# EAGLE board CT_schematic (EAGLE 7.6.0)

Size 100 x 80 mm. Coordinates in mm from the lower left corner, seen from the top.
Outline: 0,0 100,0 100,80 0,80 0,0
Copper layers (1*16): Top 0.035mm / dielectric 1.5mm / Bottom 0.035mm
Design rules "default": minimum track width 10mil, minimum drill 24mil, track to track 8mil, track to pad 8mil, pad to pad 8mil, via to via 8mil, smd to smd 8mil, copper to edge 40mil, drill to drill 8mil, minimum pad ring 10mil, minimum via ring 8mil, stop-mask expansion 4mil, vias tented up to drill 0mil, thermal gap 10mil

## Footprints (pad centres in the part's own frame; a part is rotated, then mirrored left to right if it is on the bottom)
C0603 = smd 0.8 x 0.8: 1 -0.762,0; 2 0.762,0
C0402 = smd 0.5 x 0.5: 1 -0.508,0; 2 0.508,0
C1206 = smd 1.3 x 1.6: 1 -1.524,0; 2 1.524,0
C1210 = smd 1.2 x 2.5: 1 -1.524,0; 2 1.524,0
EXV-9H = smd 3.505 x 1.676: 1 -2.857,0; 2 2.857,0
L0603 = smd 0.8 x 0.8: 1 -0.762,0; 2 0.762,0
PJ-037B_PACKAGE = drill 3.7 square: 1 12,0 | drill 3.2 square: 2 6,0
R0603 = smd 0.8 x 0.8: 1 -0.762,0; 2 0.762,0
LQFP64 = smd 0.3 x 1.2: 1 -3.75,-5.75; 2 -3.25,-5.75; 3 -2.75,-5.75; 4 -2.25,-5.75; 5 -1.75,-5.75; 6 -1.25,-5.75; 7 -0.75,-5.75; 8 -0.25,-5.75; 9 0.25,-5.75; 10 0.75,-5.75; 11 1.25,-5.75; 12 1.75,-5.75; 13 2.25,-5.75; 14 2.75,-5.75; 15 3.25,-5.75; 16 3.75,-5.75; 33 3.75,5.75; 34 3.25,5.75; 35 2.75,5.75; 36 2.25,5.75; 37 1.75,5.75; 38 1.25,5.75; 39 0.75,5.75; 40 0.25,5.75; 41 -0.25,5.75; 42 -0.75,5.75; 43 -1.25,5.75; 44 -1.75,5.75; 45 -2.25,5.75; 46 -2.75,5.75; 47 -3.25,5.75; 48 -3.75,5.75 | smd 1.2 x 0.3: 17 5.75,-3.75; 18 5.75,-3.25; 19 5.75,-2.75; 20 5.75,-2.25; 21 5.75,-1.75; 22 5.75,-1.25; 23 5.75,-0.75; 24 5.75,-0.25; 25 5.75,0.25; 26 5.75,0.75; 27 5.75,1.25; 28 5.75,1.75; 29 5.75,2.25; 30 5.75,2.75; 31 5.75,3.25; 32 5.75,3.75; 49 -5.75,3.75; 50 -5.75,3.25; 51 -5.75,2.75; 52 -5.75,2.25; 53 -5.75,1.75; 54 -5.75,1.25; 55 -5.75,0.75; 56 -5.75,0.25; 57 -5.75,-0.25; 58 -5.75,-0.75; 59 -5.75,-1.25; 60 -5.75,-1.75; 61 -5.75,-2.25; 62 -5.75,-2.75; 63 -5.75,-3.25; 64 -5.75,-3.75
SAMTEC_FTSH-105-01-L-DV-K = smd 0.762 x 2.794: 1 -2.54,-2.032; 2 -2.54,2.032; 3 -1.27,-2.032; 4 -1.27,2.032; 5 0,-2.032; 6 0,2.032; 7 1.27,-2.032; 8 1.27,2.032; 9 2.54,-2.032; 10 2.54,2.032
WNG008 = smd 0.45 x 0.55: 1 -1.27,0; 2 0,0; 3 1.27,0; 4 2.54,0; 5 2.54,7.5; 6 1.27,7.5; 7 0,7.5; 8 -1.27,7.53 | smd 4.9 x 4.75: PAD 0.635,3.75
XCVR_SPBTLE-RF = smd 1.6 x 1: 1 -6.75,0.33; 2 -6.75,-0.94; 3 -6.75,-2.21; 4 -6.75,-3.48; 5 -6.75,-4.75; 7 6.75,-4.75; 8 6.75,-3.48; 9 6.75,-2.21; 10 6.75,-0.94; 11 6.75,0.33 | smd 1 x 1.6: 6 -2.75,-5.75
USB-A-H = drill 0.914: 1 2.718,3.493; 2 2.718,1.003; 3 2.718,-1.003; 4 2.718,-3.493 | drill 2.311: 5 0,-6.566; 6 0,6.566
SOT143B = smd 1 x 0.7: 1 -0.75,-1 | smd 0.6 x 0.7: 2 0.95,-1; 3 0.95,1; 4 -0.95,1
ASEK = smd 1.4 x 1: 1 -1.1,-0.8; 2 1.1,-0.8; 3 1.1,0.8; 4 -1.1,0.8
ASFL1 = smd 1.7 x 1.5: 1 -1.27,-1.1; 2 1.27,-1.1; 3 1.27,1.1; 4 -1.27,1.1
WSON-8 = smd 0.3 x 0.6: 1 -0.75,0; 2 0.05,0; 3 0.85,0; 4 1.65,0; 5 1.65,3.8; 6 0.85,3.8; 7 0.05,3.8; 8 -0.75,3.8 | smd 3 x 2.6: PAD 0.45,1.9
SON-6 = smd 0.55 x 0.3: 1 -0.355,0.5 | smd 0.52 x 0.3: 2 -0.37,0; 3 -0.37,-0.5; 4 0.37,-0.5; 5 0.37,0; 6 0.37,0.5
SW_4-1437565-2 = smd 1.4 x 2.1: 1 -2.23,4.55; 2 -2.23,-4.55; 3 2.23,4.55; 4 2.23,-4.55
LGM67K-G1J2-24-Z = smd 0.8 x 1.4: A -2,0; C 0,0
NC7SZ125M5X = smd 1.3 x 0.7: 1 -1.3,0.95; 2 -1.3,0; 3 -1.3,-0.95; 4 1.3,-0.95; 5 1.3,0.95
DUMMY_PACKAGE_140 = drill 0.3: 1 0,-1; 2 1.5,-1; 3 3,-1

## Placement (x,y rotation side)
C1  1e-07  [C0603]  -38.1,73.66 0 top  (outside the outline)
C2  1e-07  [C0603]  -41.91,73.66 0 top  (outside the outline)
C3  1e-07  [C0603]  -45.72,73.66 0 top  (outside the outline)
C4  1e-07  [C0603]  -49.53,73.66 0 top  (outside the outline)
C5  4.7e-06  [C0603]  -34.29,73.66 0 top  (outside the outline)
C6  1e-07  [C0603]  -53.34,73.66 0 top  (outside the outline)
C7  1e-08  [C0603]  -57.15,73.66 0 top  (outside the outline)
C8  1e-06  [C0603]  -60.96,73.66 0 top  (outside the outline)
C9  1e-07  [C0402]  -38.1,78.74 0 top  (outside the outline)
C10  1e-08  [C0402]  -41.91,78.74 0 top  (outside the outline)
C11  1e-06  [C0603]  -64.77,73.66 0 top  (outside the outline)
C12  1e-07  [C0402]  -45.72,78.74 0 top  (outside the outline)
C13  1e-08  [C0402]  -49.53,78.74 0 top  (outside the outline)
C14  1e-08  [C0402]  -53.34,78.74 0 top  (outside the outline)
C15  1e-08  [C0402]  -57.15,78.74 0 top  (outside the outline)
C16  1e-05  [C1206]  -57.15,59.69 0 top  (outside the outline)
C17  1e-05  [C1210]  -50.8,60.96 0 top  (outside the outline)
C18  1e-07  [C0402]  -60.96,78.74 0 top  (outside the outline)
C19  0.0001  [EXV-9H]  -17.78,60.96 0 top  (outside the outline)
C20  0.0001  [EXV-9H]  -29.21,60.96 0 top  (outside the outline)
C21  1e-08  [C0402]  -64.77,78.74 0 top  (outside the outline)
C22  1e-08  [C0402]  -68.58,78.74 0 top  (outside the outline)
C23  1e-08  [C0402]  -72.39,78.74 0 top  (outside the outline)
F1  240.0  [L0603]  -68.58,73.66 0 top  (outside the outline)
J1  PJ-037B  [PJ-037B_PACKAGE]  -57.15,25.4 0 top  (outside the outline)
R2  1000.0  [R0603]  -72.39,73.66 0 top  (outside the outline)
R4  4700.0  [R0603]  -15.24,78.74 0 top  (outside the outline)
R5  4700.0  [R0603]  -19.05,78.74 0 top  (outside the outline)
R6  10000.0  [R0603]  -41.91,67.31 0 top  (outside the outline)
R7  10000.0  [R0603]  -46.99,67.31 0 top  (outside the outline)
R8  10000.0  [R0603]  -52.07,67.31 0 top  (outside the outline)
R9  10000.0  [R0603]  -57.15,67.31 0 top  (outside the outline)
R10  5.0  [R0603]  -22.86,78.74 0 top  (outside the outline)
R11  10000.0  [R0603]  -62.23,67.31 0 top  (outside the outline)
R12  10000.0  [R0603]  -67.31,67.31 0 top  (outside the outline)
R13  10000.0  [R0603]  -72.39,67.31 0 top  (outside the outline)
R14  10000.0  [R0603]  -15.24,73.66 0 top  (outside the outline)
R15  100000.0  [R0603]  -21.59,67.31 0 top  (outside the outline)
R16  47000.0  [R0603]  -20.32,73.66 0 top  (outside the outline)
R17  100000.0  [R0603]  -26.67,67.31 0 top  (outside the outline)
R18  2231.0  [R0603]  -26.67,78.74 0 top  (outside the outline)
R19  1000.0  [R0603]  -30.48,78.74 0 top  (outside the outline)
R20  10000.0  [R0603]  -25.4,73.66 0 top  (outside the outline)
R21  10000.0  [R0603]  -30.48,73.66 0 top  (outside the outline)
R22  9100.0  [R0603]  -34.29,78.74 0 top  (outside the outline)
R23  680000.0  [R0603]  -31.75,67.31 0 top  (outside the outline)
R24  120000.0  [R0603]  -36.83,67.31 0 top  (outside the outline)
U1  STM32L151R8T6A  [LQFP64]  -25.4,40.64 0 top  (outside the outline)
U2  FTSH-105-01-L-DV-K  [SAMTEC_FTSH-105-01-L-DV-K]  -35.56,26.67 0 top  (outside the outline)
U3  S25FL128SDPNFI001  [WNG008]  -67.31,36.83 0 top  (outside the outline)
U4  SPBTLE-RF  [XCVR_SPBTLE-RF]  -21.59,10.16 0 top  (outside the outline)
U5  61400416021  [USB-A-H]  -36.83,8.89 0 top  (outside the outline)
U6  prtr5v0u2ax  [SOT143B]  -24.13,83.82 0 top  (outside the outline)
U7  ASEK-32.768KHz-ECST  [ASEK]  -67.31,50.8 0 top  (outside the outline)
U8  ASFL1-25MHZ-NCS  [ASFL1]  -46.99,52.07 0 top  (outside the outline)
U9  LP3878SDX-ADJ/NOPB  [WSON-8]  -30.48,50.8 0 top  (outside the outline)
U10  TPS3895ADRYR  [SON-6]  -33.02,82.55 0 top  (outside the outline)
U11  4-1437565-2  [SW_4-1437565-2]  -46.99,39.37 0 top  (outside the outline)
U12  Q65110A2395  [LGM67K-G1J2-24-Z]  -39.37,60.96 0 top  (outside the outline)
U13  nc7sz125m5x  [NC7SZ125M5X]  -62.23,59.69 0 top  (outside the outline)
U14  nc7sz125m5x  [NC7SZ125M5X]  -68.58,59.69 0 top  (outside the outline)
U15  nc7sz125m5x  [NC7SZ125M5X]  -15.24,67.31 0 top  (outside the outline)
U16  Dummy  [DUMMY_PACKAGE_140]  -30.48,83.82 0 top  (outside the outline)

## Library data of the parts
C1-C23 F1 J1 R2 R4-R24 U1-U16 = circuit_tree

## Nets
CLK_U1_3: U1.3 U7.3
CLK_U1_5: U1.5 U8.3
GND: C1.2 C2.2 C3.2 C4.2 C5.2 C6.2 C7.2 C8.2 C9.2 C10.2 C11.2 C12.2 C13.2 C14.2 C15.2 C16.2 C17.2 C18.2 C19.2 C20.2 C21.2 C22.2 C23.2 J1.2 R2.2 R6.2 R10.2 R15.2 R16.2 R19.2 R22.2 R24.2 U1.12 U1.18 U1.31 U1.47 U1.63 U2.3 U2.5 U3.4 U3.PAD U4.6 U5.4 U5.5 U5.6 U6.1 U7.2 U8.2 U9.3 U9.PAD U10.2 U12.C U13.2 U13.3 U14.1 U14.3 U15.1 U15.3 U16.1
NET_U1_1: C6.1 U1.1
NET_U1_7: R5.1 U1.7 U15.4
NET_U1_13: C7.1 C8.1 F1.1 U1.13
NET_U1_60: R6.1 U1.60
NET_U1_61: U12.A
NET_U1_62: U11.3 U11.4
NET_U2_9: R10.1 U2.9
NET_U3_3: R11.1 U3.3
NET_U3_7: R13.1 U3.7
NET_U4_11: R4.1 U4.11 U14.4
NET_U6_4: U5.1 U6.4
NET_U9_1: C15.1 U9.1
NET_U9_6: R18.2 R19.1 U9.6
NET_U9_8: R17.1 U9.8
NET_U10_1: R21.1 R22.1 U10.1
NET_U10_3: R23.2 R24.1 U10.3
NET_U10_4: R20.1 U10.4 U13.4 U14.2 U15.2
NET_U11_1: R2.1 U11.1 U11.2
PROC_GPIO_TO_U4_SPI_IRQ: R16.1 U1.2 U4.4
PROC_PC15_OSC32_OUT: U1.4 U16.2
PROC_PH1_OSC_OUT: U1.6 U16.3
PROC_SPI1_MISO: U1.22 U4.8
PROC_SPI1_MOSI: U1.23 U4.9
PROC_SPI1_NSS: R14.1 U1.20 U4.10
PROC_SPI1_SCK: R15.1 U1.21 U4.7
PROC_SPI2_MISO: U1.35 U3.2
PROC_SPI2_MOSI: U1.36 U3.5
PROC_SPI2_NSS: R12.1 U1.33 U3.1
PROC_SPI2_SCK: U1.34 U3.6
PROC_SYS_JTCK_SWCLK: R8.1 U1.49 U2.4
PROC_SYS_JTDO_TRACESWO: U1.55 U2.6
PROC_SYS_JTMS_SWDIO: R9.1 U1.46 U2.2
PROC_USB_DM: U1.44 U5.2 U6.3
PROC_USB_DP: U1.45 U5.3 U6.2
RST_OUT_U2_JTAG_RST_B: R7.1 U2.10 U13.1
VCC_S1_9V4: C16.1 C19.1 C20.1 J1.1 R17.2 U9.4
VCC_TIER1_3V3: C1.1 C2.1 C3.1 C4.1 C5.1 C9.1 C10.1 C11.1 C12.1 C13.1 C14.1 C17.1 C18.1 C21.1 C22.1 C23.1 F1.2 R4.2 R5.2 R7.2 R8.2 R9.2 R11.2 R12.2 R13.2 R14.2 R18.1 R20.2 R21.2 R23.1 U1.19 U1.32 U1.48 U1.64 U2.1 U3.8 U4.5 U7.4 U8.4 U9.5 U10.6 U13.5 U14.5 U15.5

## Tracks (layer width: path | path; a pad name or v marks a point on that pad's centre or on a via)
CLK_U1_3  (1 unrouted)
CLK_U1_5  (1 unrouted)
GND  (58 unrouted)
NET_U1_1  (1 unrouted)
NET_U1_7  (2 unrouted)
NET_U1_13  (3 unrouted)
NET_U1_60  (1 unrouted)
NET_U1_62  (1 unrouted)
NET_U2_9  (1 unrouted)
NET_U3_3  (1 unrouted)
NET_U3_7  (1 unrouted)
NET_U4_11  (2 unrouted)
NET_U6_4  (1 unrouted)
NET_U9_1  (1 unrouted)
NET_U9_6  (2 unrouted)
NET_U9_8  (1 unrouted)
NET_U10_1  (2 unrouted)
NET_U10_3  (2 unrouted)
NET_U10_4  (4 unrouted)
NET_U11_1  (2 unrouted)
PROC_GPIO_TO_U4_SPI_IRQ  (2 unrouted)
PROC_PC15_OSC32_OUT  (1 unrouted)
PROC_PH1_OSC_OUT  (1 unrouted)
PROC_SPI1_MISO  (1 unrouted)
PROC_SPI1_MOSI  (1 unrouted)
PROC_SPI1_NSS  (2 unrouted)
PROC_SPI1_SCK  (2 unrouted)
PROC_SPI2_MISO  (1 unrouted)
PROC_SPI2_MOSI  (1 unrouted)
PROC_SPI2_NSS  (2 unrouted)
PROC_SPI2_SCK  (1 unrouted)
PROC_SYS_JTCK_SWCLK  (2 unrouted)
PROC_SYS_JTDO_TRACESWO  (1 unrouted)
PROC_SYS_JTMS_SWDIO  (2 unrouted)
PROC_USB_DM  (2 unrouted)
PROC_USB_DP  (2 unrouted)
RST_OUT_U2_JTAG_RST_B  (2 unrouted)
VCC_S1_9V4  (5 unrouted)
VCC_TIER1_3V3  (43 unrouted)